# Altium PCB PCB1.PcbDoc (part 2 of 2)
Units mil, origin at the board's own origin, x right, y up, seen from the top; angles counter-clockwise.
Board outline 4330 x 2220 mil, 2 copper layers (Top Layer, Bottom Layer); 72 components, 51 nets, 254 pads, 65 vias.
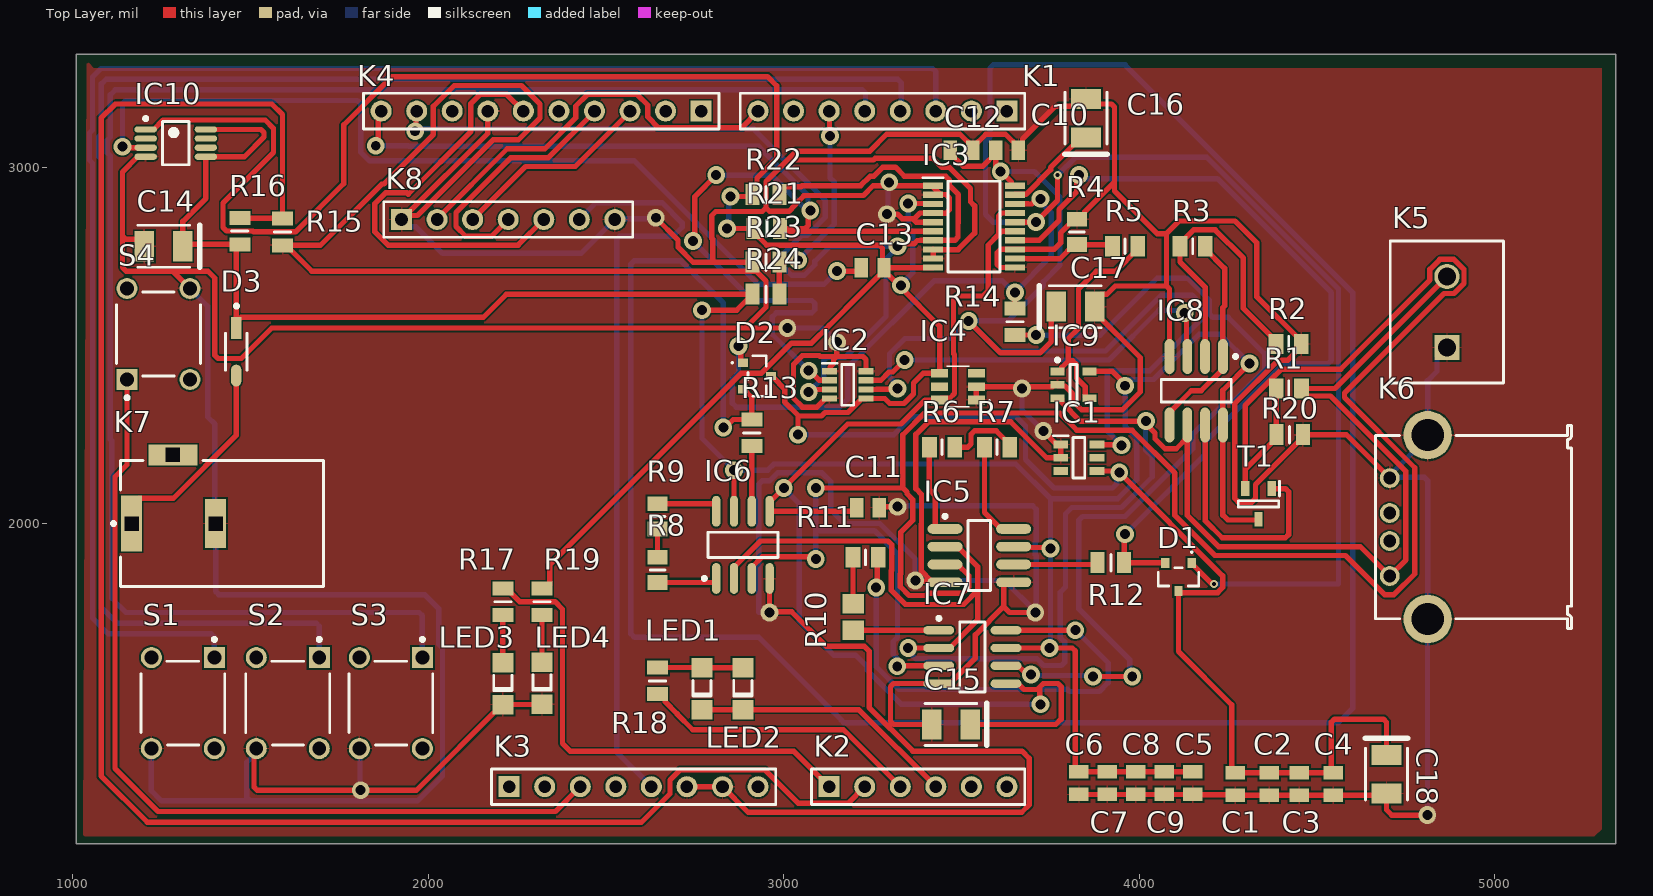
[diagram p0: Top Layer view]

## Via types
v1: diameter 50, hole 28, Top Layer to Bottom Layer, 63 vias
v2: diameter 23.62, hole 11.81, Top Layer to Bottom Layer, 2 vias

## Nets (pads, with @x,y where several pads share a name; then routed paths per layer and width w, separated by ;. In a path a pad name is that pad's centre, name@x,y a point inside that pad or via, vN(x,y) a via of type N, cw(c..) or ccw(c..) an arc to the next point about the centre after c; other vN are vias at no path point) (continued)
NetK1_5: (continued)
  Bottom Layer w15: S3.1 1983.58,1741.21 1974.8,1750 1150,1750 1110,1790 1110,2233.09 1105.81,2237.29 1105.81,3034.09 1097.5,3042.4 1097.5,3077.6 1105.81,3085.91 1105.81,3205.81 1120,3220 3221.21,3220 3230,3211.21 3230,3162.4 K1.5
NetK1_6: K1.6 R23.2 R24.1 | length 612.7
  Top Layer w15: R24.1 R23.2 2992.87,2740.47 v1(3040,2740.47) ; K1.6 3128.8,3158.8 3128.8,3091.2 v1(3130,3090)
  Bottom Layer w15: v1(3040,2740.47) 3142.09,2842.57 3142.09,2960.26 3130,2972.36 v1(3130,3090)
NetK1_7: K1.7
NetK1_8: K1.8 K8.2 | length 1146.6
  Top Layer w15: K8.2 2025,2856.86 2222.19,3054.05 2328.16,3054.05 2414.63,3140.52 2414.63,3173.53 2448.12,3207.03 2587.08,3207.03 2617.6,3176.51 2617.6,3143.49 2648.12,3112.97 2880.57,3112.97 K1.8
NetK2_1: K2.1 R17.1 | length 1369.8
  Top Layer w15: R17.1 2219.84,1817.4 2257.03,1780.22 2356.34,1780.22 2377.56,1758.99 2377.56,1381.22 2398.79,1360 3027.6,1360 K2.1
NetK2_2: K2.2 R15.1 R16.2 | length 5146.2
  Top Layer w15: R16.2 1471.3,2858.7 1588.7,2858.7 R15.1 1590,3150 1560,3180 1120,3180 1080,3140 1080,1290 1210,1160 2600,1160 2680,1240 2680,1278.91 2708.12,1307.03 2947.08,1307.03 3041.13,1212.97 3180.57,1212.97 K2.2
NetK2_3: K2.3 R18.1 | length 796.8
  Top Layer w15: R18.1 2654.84,1520.2 2667.03,1508.01 2667.03,1498.17 2700.13,1465.07 2700.13,1463.98 2744.11,1420 3167.6,1420 K2.3
NetK2_4: K2.4 LED1.1 LED2.1 | length 747
  Top Layer w15: LED1.1 LED2.1 3211.65,1475.94 K2.4
NetK3_3: K3.3 S4.1 | length 2495.7
  Top Layer w15: S4.1 1152.83,2165.39 1119.04,2131.59 1119.04,1310.96 1240,1190 2357.6,1190 K3.3
NetK3_5: K3.5 K8.6 | length 2122.9
  Bottom Layer w15: K8.6 2472.5,2902.5 2657.6,2902.5 2714.25,2845.86 2714.25,2833.43 2688.79,2807.97 2538.79,2807.97 2530,2799.19 2530,1357.6 K3.5
NetK4_3: K4.3 K8.3 | length 570
  Top Layer w15: K8.3 2274.05,3004.05 2413.51,3004.05 2567.6,3158.14 K4.3
NetK4_4: K4.4 K8.4 | length 725.9
  Top Layer w15: K8.4 2177.97,2807.97 2105.52,2807.97 2077.97,2835.52 2077.97,2874.48 2232.55,3029.05 2338.51,3029.05 2467.6,3158.14 K4.4
NetK4_6: K4.6 K8.5 | length 1213.7
  Top Layer w15: K4.6 2220.57,3207.03 2145.81,3207.03 2120,3181.21 2120,3102.43 1943.79,2926.21 1940,2930 1880,2930 1850,2900 1850,2820 1887.03,2782.97 2252.97,2782.97 K8.5
NetLED1_2: LED1.2 LED2.2 R18.2 | length 240.4
  Top Layer w15: R18.2 2769.06,1595 LED1.2 LED2.2
NetLED3_2: LED3.2 R17.2 | length 133.5
  Top Layer w15: LED3.2 R17.2
NetLED4_2: LED4.2 R19.2 | length 132.6
  Top Layer w15: LED4.2 R19.2
NetR6_2: R6.2 R7.2 | length 213.6
  Top Layer w15: R6.2 3517.61,2215 3526.4,2223.79 3526.4,2250.79 3536.65,2261.04 3597.26,2261.04 3635.43,2222.87 R7.2
NetR8_2: R8.2 R9.2 | length 79.6
  Top Layer w15: R8.2 R9.2
NetR10_2: R10.2 R11.2 | length 130.2
  Top Layer w15: R11.2 3194.57,1775.43 R10.2
VCC: C5.1 C6.1 C7.1 C8.1 C9.1 C14.1 D3.1 IC5.7 IC6.7 IC7.7 IC8.8 IC9.5 IC10.5 IC10.8 R16.1 R24.2 T1.3 | length 7302.7
  Top Layer w15: IC10.8 1529.6,3108.39 1538.39,3099.6 1538.39,3087.17 1482.83,3031.61 IC10.5 1374.65,2914.65 1310,2850 C14.1 1315.2,2785.2 R16.1 1460,2775.2 1460,2573.16 D3.1@1460,2566.04 ; D3.1 D3.1@1460,2566.04 ; v1(2770,2600) 2867.6,2600 R24.2 2219.68,2645 2154.68,2580 1473.96,2580 D3.1@1460,2566.04 ; IC6.7 v1(2860,2150) ; IC7.7 3811.21,1650 3820,1641.21 3820,1311.89 C6.1 C7.1 C8.1 C9.1 C5.1 ; IC5.7 3648.86,1932.6 3747.4,1932.6 v1(3750,1930) ; IC9.5 3861.57,2428.7 3923.42,2428.7 3960,2392.12 v1(3960,2387.5) ; v1(4310,2450) 4235,2375 IC8.8 4235,2023.79 4248.79,2010 4333.31,2010 T1.3
  Bottom Layer w15: v1(2770,2600) 2770,2240 v1(2860,2150) 2954.54,2150 2972.04,2167.5 3652.5,2167.5 3750,2070 ; v1(3747.5,1650) 3750,1652.5 v1(3750,1930) 3750,2070 ; v1(4310,2450) 4227.5,2532.5 4167.86,2532.5 4040.36,2405 3960,2405 3960,2274.39 3992.5,2241.89 3992.5,2123.21 3939.29,2070 3750,2070
pads on no net: IC1.3 IC1.5 IC4.3 IC4.5 IC10.2 IC10.6 IC10.7 K1.1 K1.2 K2.5 K2.6 K3.1 K3.2 K3.4 K3.8 K4.1 K4.2 K4.5 K4.8 K6.2 K6.3 K7.2 S1.2 S1.3 S2.2 S2.3 S3.2 S3.3 S4.2 S4.3

## Polygon pours and split planes (outlines as drawn)
GND on Top Layer "GND_L01_P000" (solid, pour order 0): 1040,3300 1060,3280 5300,3280 5300,1140 5280,1120 1030,1120

## Silkscreen, mask and mechanical layers (free items; w line width, h text height)
board outline:
  lines w10: 1020,3310 5330,3310 5330,1100 5320,1110 1040,1110 1030,1120 1030,3300 1030,3310

## Text inside footprints (layer, text, board x,y; h text height)
K6: Top 3D Body "PCB Edge" at 5263.62,1903.39 h32 r90